# Altium PCB PCB.PcbDoc
Units mm, origin at the board's own origin, x right, y up, seen from the top; angles counter-clockwise.
Board outline 65.15 x 49.28 mm, 2 copper layers (Top Layer, Bottom Layer); 11 components, 8 nets, 25 pads, 0 vias.
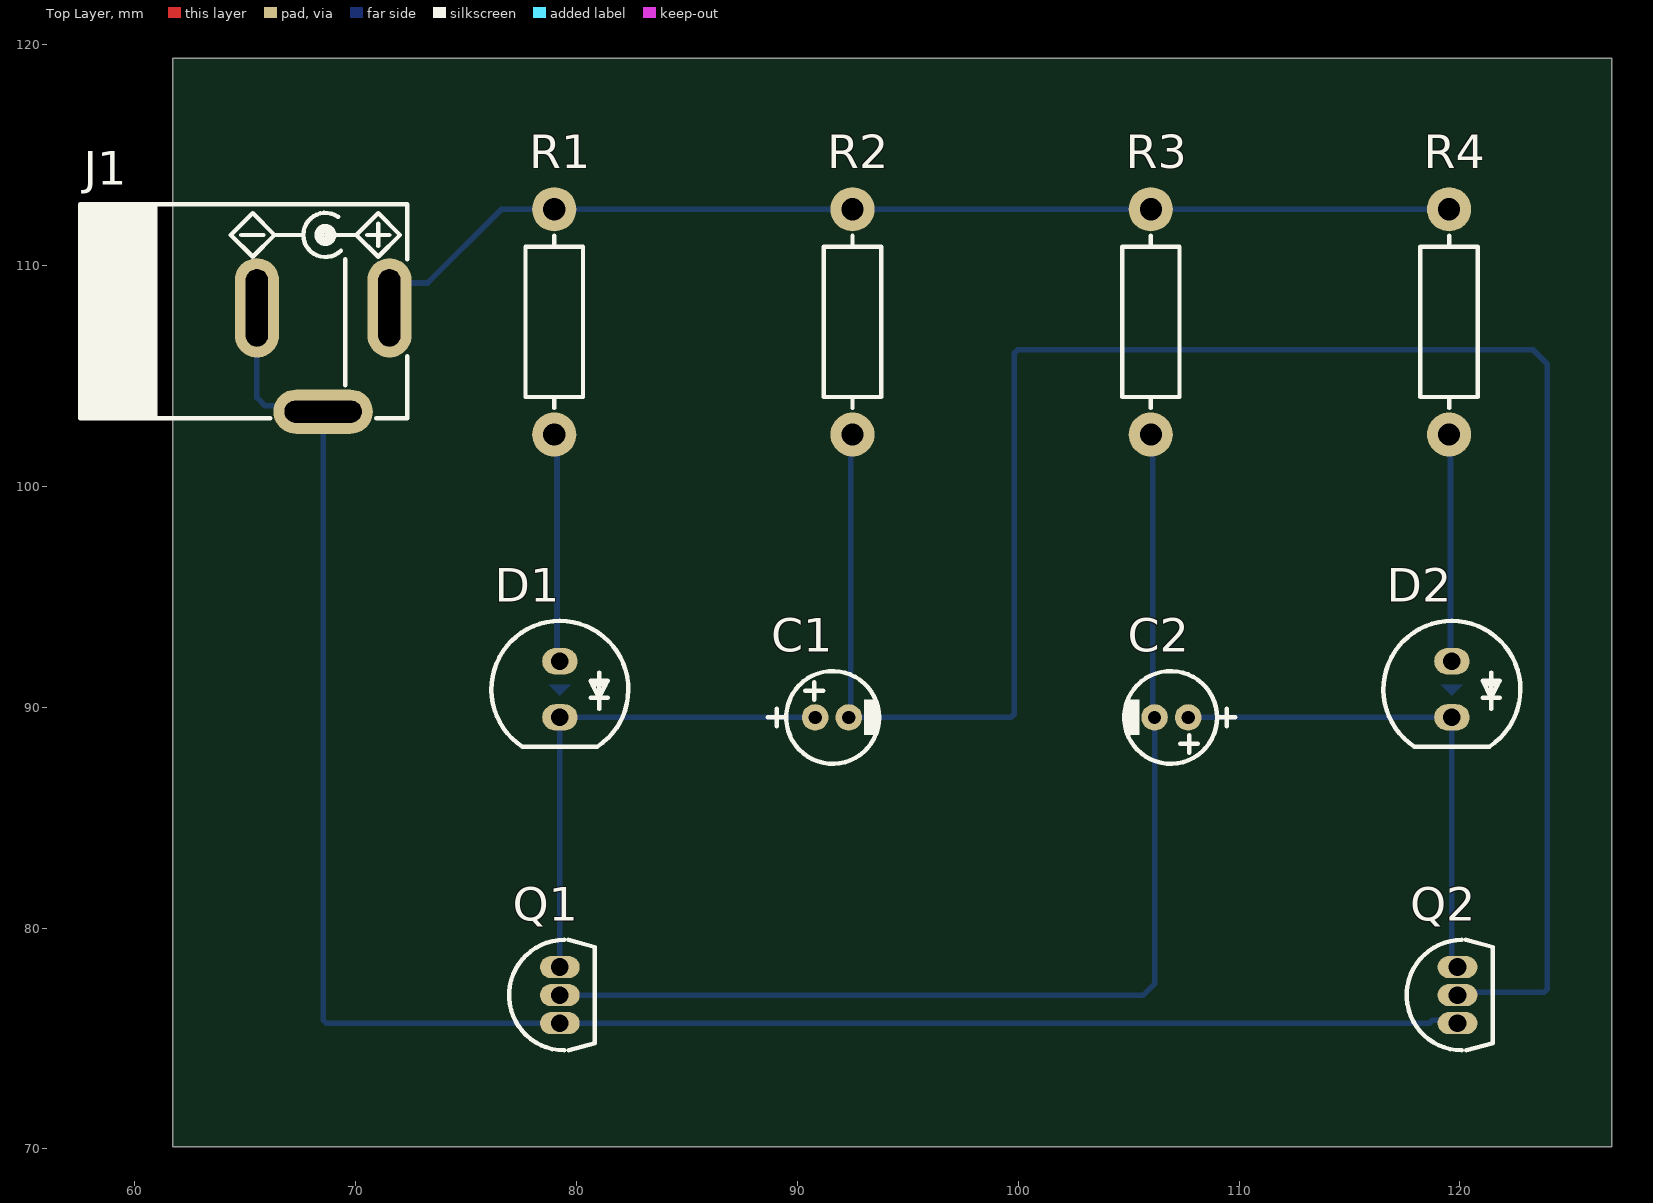
[diagram p0: Top Layer view]
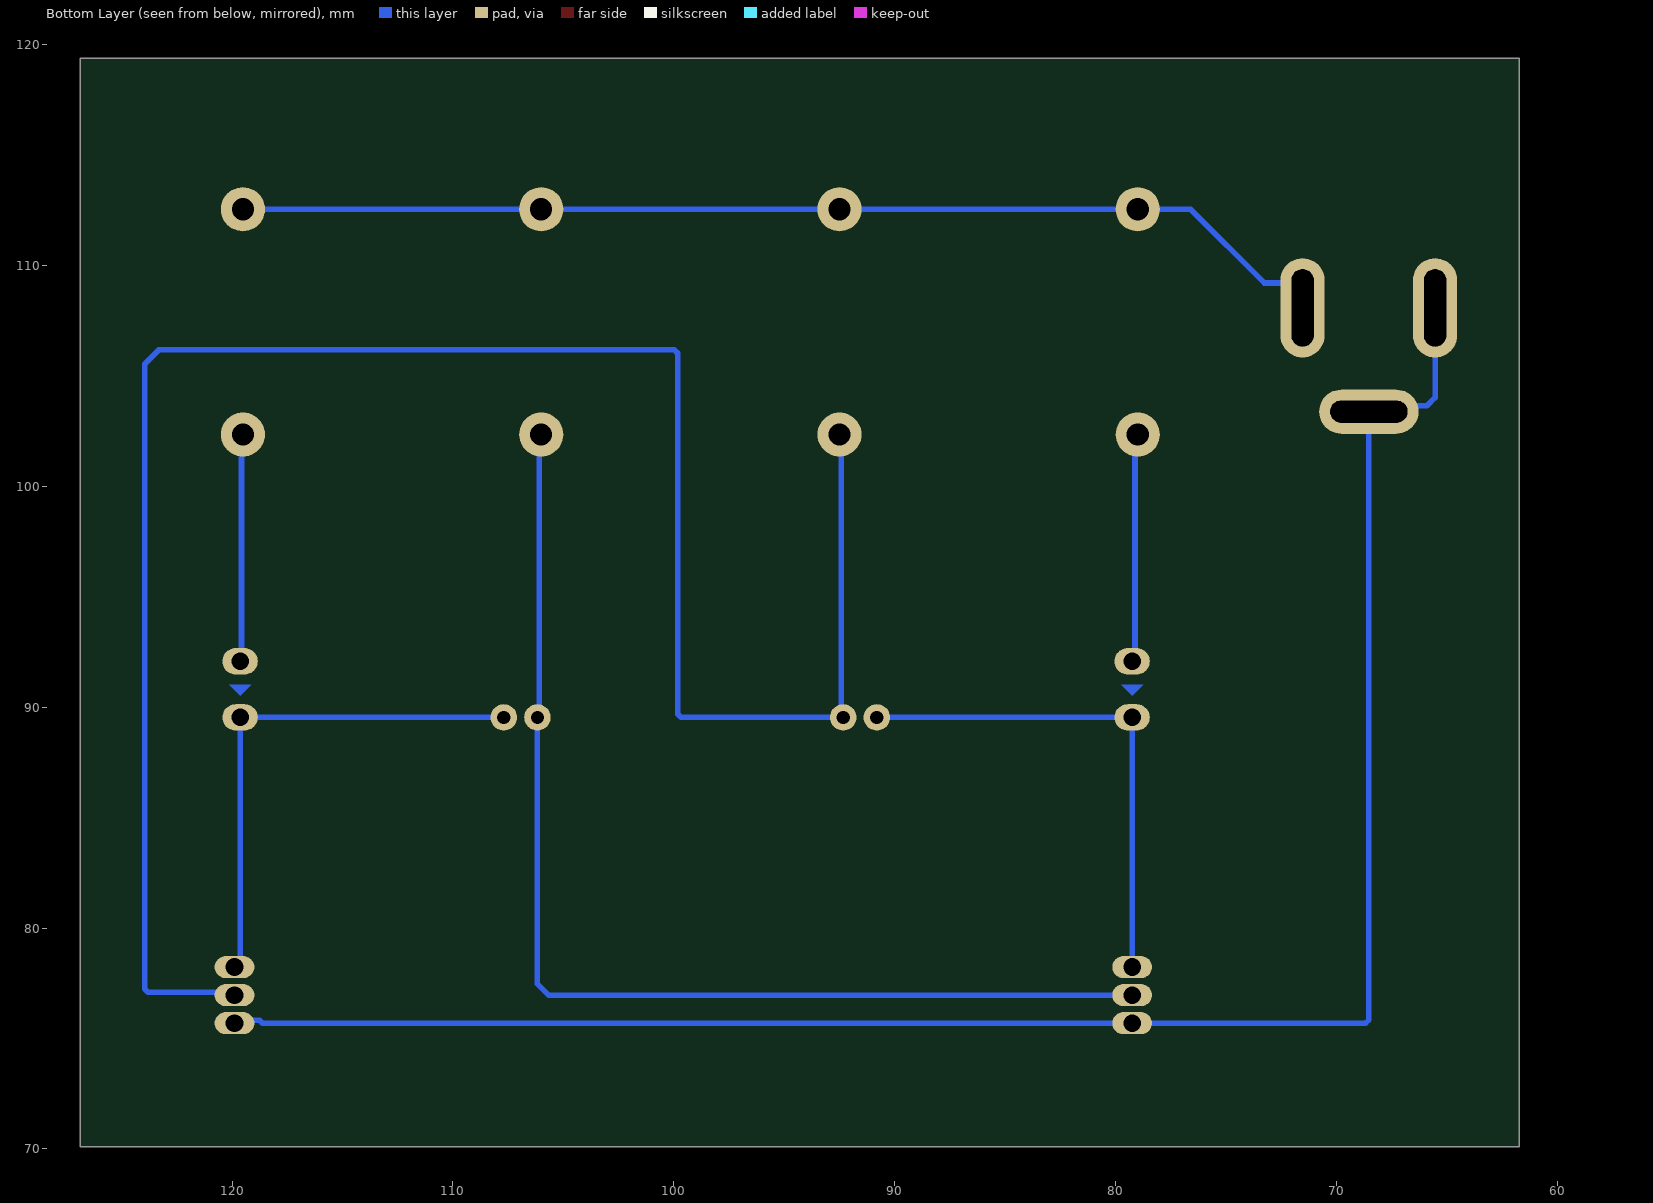
[diagram p1: Bottom Layer view, seen from below]
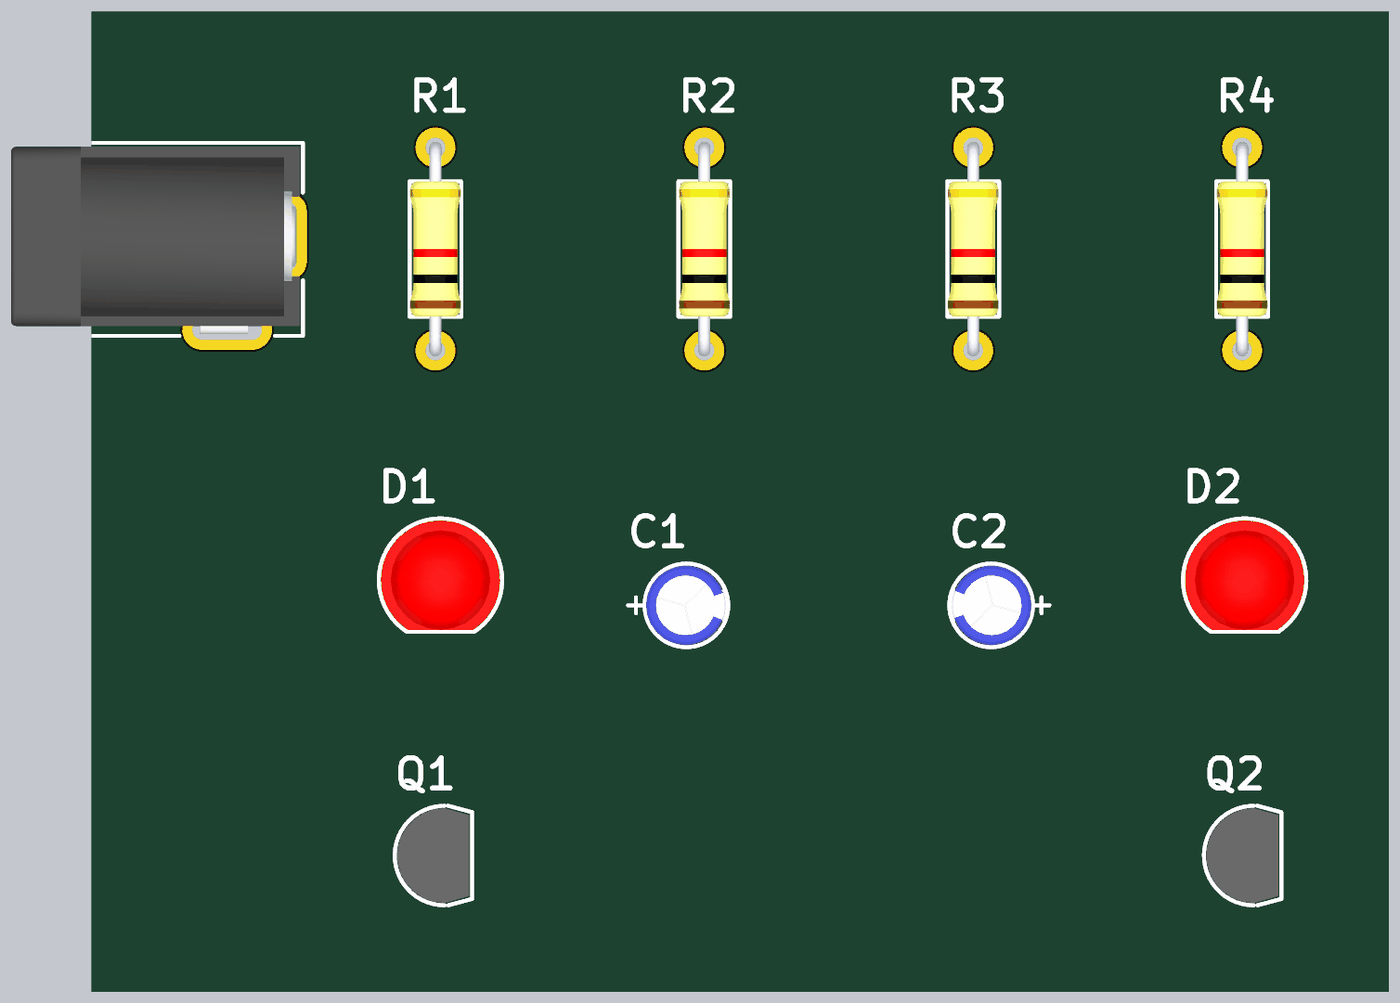
[diagram p2: 3D render of the assembled board from above, using the file's embedded part models]

## Layer stack, top to bottom
Top Solder: solder mask 0.0102, Solder Resist, Dk 3.5
Top Layer: signal copper 0.0356
Dielectric 1: dielectric 0.32, FR-4, Dk 4.8
Bottom Layer: signal copper 0.0356
Bottom Solder: solder mask 0.0102, Solder Resist, Dk 3.5

## Board outline
61.722,70.104 126.873,70.104 126.873,119.38 61.722,119.38

## Design rules (kind name [scope] priority, off if disabled: settings)
Clearance [All] p1: gap=0.254 ignorepadtopadclearanceinfootprint=FALSE except(0: Arc-Hole Track-Hole SMDPad-Hole THPad-Hole Via-Hole Fill-Hole Poly-Hole Region-Hole Text-Hole)
PolygonConnect [All] p1: connectstyle=Relief reliefconductorwidth=0.254 reliefentries=4 polygonreliefangle="90 Angle" airgapwidth=0.254
RoutingVias [All] p1: holewidth=0.711 width=1.27 viastyle="Through Hole" minholewidth=0.711 minwidth=1.27 maxholewidth=0.711 maxwidth=1.27
SolderMaskExpansion [All] p1: expansion=0.102 istentingtop=FALSE
Width [All] p1: maxlimit=0.254 minlimit=0.254 preferedwidth=0.254
30 further rules are at their usual default settings.

## Components (designator, comment, footprint, x,y, rotation, side; value= is the part's Value field where it differs from the comment)
C1 "10uF" C_EL_4X7 91.567,89.535 r0 top
C2 "10uF" C_EL_4X7 106.934,89.535 r180 top
D1 "LED5MM_RED" LED5MM_RED 79.248,90.805 r270 top
D2 "LED5MM_RED" LED5MM_RED 119.634,90.805 r270 top
J1 "DC_POWER_JACK" JAC_PWR2 71.532,108.077 r90 top
Q1 "2N2222A" TO92_3 79.248,76.962 r90 top
Q2 "2N2222A" TO92_3 119.888,76.962 r90 top
R1 "470" R025W_AX04 78.994,107.442 r90 top
R2 "47K" R025W_AX04 92.498,107.442 r90 top
R3 "47K" R025W_AX04 106.003,107.442 r90 top
R4 "470" R025W_AX04 119.507,107.442 r90 top

## Footprints (in the part's own frame and the unit in brackets; to place one, negate y for a bottom-side part, rotate by r counter-clockwise, add the part's x,y. Pads: shape width x height; smd on the part's side, far side on the other; paste and mask are expansions set on the pad)
C_EL_4X7 [mm] "Cap Elec, D4.0X7.0H pitch: 1.5mm"
  round 1.2 hole 0.6: 1(-0.762,0) 2(0.762,0)
  silkscreen extent -2.9,-2.1 2.13,2.1, body extent -2,-2 2,2, height 1
JAC_PWR2 [mm] "DC POWER JACK, Power Jack KLDX-0202"
  oval 4.5x2 hole 1 slot 3.5 at 0 deg: 1(0,0) 2(0,6)
  oval 2x4.5 hole 1 slot 3.5 at 90 deg: 3(-4.7,3)
  silkscreen extent -5,-0.8 4.7,14, body extent -4.9,-0.65 4.5,13.85, height 10.8
LED5MM_RED [mm] "LED THD 5MM RED"
  oval 1.2x1.6 hole 0.8: 1(-1.27,0) 2(1.27,0)
  Bottom Layer region: -0.2,0.5 -0.2,-0.5 0.3,0
  silkscreen extent -3.1,-3.1 2.6,3.1, body extent -3,-3 2.5,3, height 9.14
R025W_AX04 [mm] "RESISTOR 1/4 WATT, AXIAL0.4"
  round 2 hole 1: 1(-5.1,0) 2(5.1,0)
  silkscreen extent -3.9,-1.3 3.9,1.3, body extent -5.38,-1.28 5.38,1.28, height 2.6
TO92_3 [mm] "TO-92, SOT54"
  oval 1x1.8 hole 0.8 mask+0.1: 1(-1.27,0) 2(0,0) 3(1.27,0)
  silkscreen extent -2.5,-1.59 2.5,2.3, body extent -2.38,-1.45 2.38,2.18, height 4.82

## Part data
C1 C2: library part CAP_THD_EL_10u25V, "CAP, THD, ELEC, 10uF, 25V", MANF=MANF, MANF_P#=MANF_PART#, PARAM=25V, PARAM2=PARAM2
D1 D2: library part LED_THD_5MM_RED, "LED, THD, 5MM, RED", ASSEMBLY=ASSEMBLY, DESC=DESCRIPTION, MANF=MANF, MANF_P#=MANF_PART#, PARAM2=2.2V, PRICE=PRICE
J1: library part CONN_PWR_JACKR2, "CONN, PWR JACK DC, PLUG DIAM 2.0MM RA THD", MANF="CUI STACK", MANF_P#="PJ-202A, PJ-002AH, PJ-102AH, KLDX-0202"
Q1 Q2: library part NPN_2N2222A_TO92, "BJT, NPN, 40v, 0.6A, THD, TO92", MANF=DIOTEC, MANF_P#=2N2222A, PARAM="0.6A, hFE100~300", PARAM2="40v, 625mW"
R1 R2 R3 R4: library part RES_THD, "RESISTOR, THD", ASSEMBLY=ASSEMBLY, DESC=DESCRIPTION, DIST#=MOUSER, MANF="KOA SPEER", MANF_P#=RK73H1ETTP4701F, PARAM=0.063W, PARAM2=1%, PRICE="100= 0.5$"

## Nets (pads, with @x,y where several pads share a name; then routed paths per layer and width w, separated by ;. In a path a pad name is that pad's centre, name@x,y a point inside that pad or via, vN(x,y) a via of type N, cw(c..) or ccw(c..) an arc to the next point about the centre after c; other vN are vias at no path point)
NetC1_1: C1.1 D1.2 Q1.3 | length 22.9
  Bottom Layer w0.254: Q1.3 D1.2 C1.1
NetC1_2: C1.2 Q2.2 R2.1 | length 93.7
  Bottom Layer w0.254: R2.1 92.414,102.257 92.414,89.62 C1.2 99.673,89.535 99.822,89.684 99.822,106.023 99.971,106.172 123.317,106.172 123.952,105.537 123.952,77.238 123.803,77.089 120.015,77.089 Q2.2
NetC2_1: C2.1 D2.2 Q2.3 | length 23.3
  Bottom Layer w0.254: C2.1 D2.2 119.634,78.486 Q2.3
NetC2_2: C2.2 Q1.2 R3.1 | length 52.1
  Bottom Layer w0.254: Q1.2 105.664,76.962 106.172,77.47 C2.2 106.087,89.62 106.087,102.257 R3.1
NetD1_1: D1.1 R1.1 | length 10.4
  Bottom Layer w0.254: R1.1 79.121,102.215 79.121,92.202 D1.1
NetD2_1: D2.1 R4.1 | length 10.3
  Bottom Layer w0.254: R4.1 119.57,102.278 119.57,92.138 D2.1
NetJ1_1: J1.1 R1.2 R2.2 R3.2 R4.2 | length 50
  Bottom Layer w0.254: J1.1 71.532,108.393 72.339,109.2 73.259,109.2 76.601,112.542 R1.2 R2.2 R3.2 R4.2
NetJ1_2: J1.2 J1.3 Q1.1 Q2.1 | length 86.4
  Bottom Layer w0.254: J1.2 65.532,104.013 65.901,103.644 68.265,103.644 J1.3 68.532,75.841 68.681,75.692 Q1.1 118.618,75.692 118.745,75.819 119.761,75.819 Q2.1